# EAGLE board snake-power (EAGLE 6.5.0)
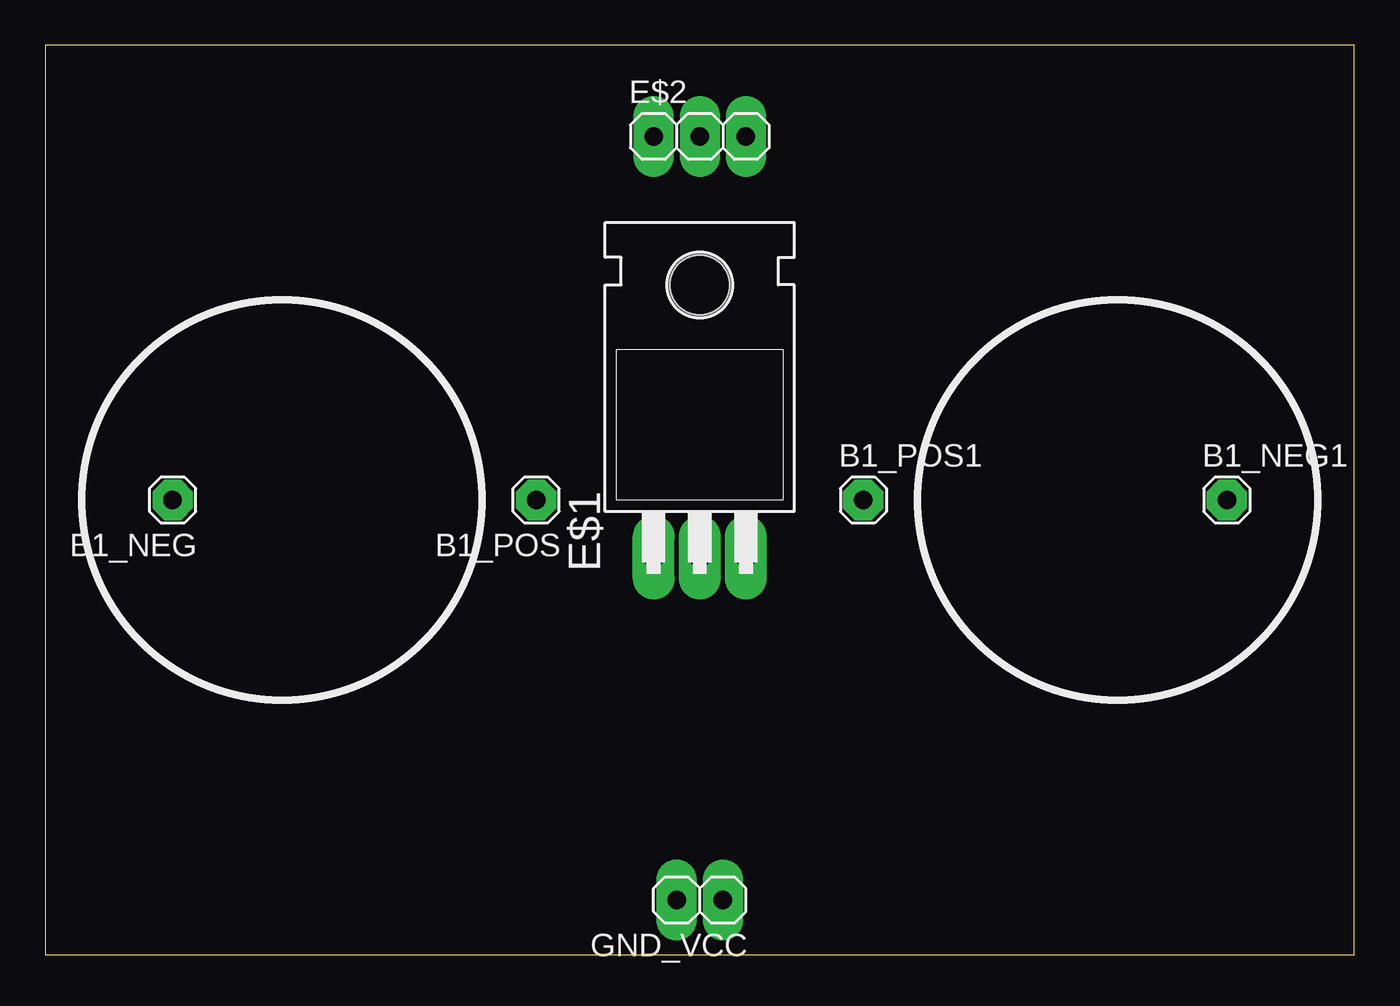
[diagram p0: board, top side]
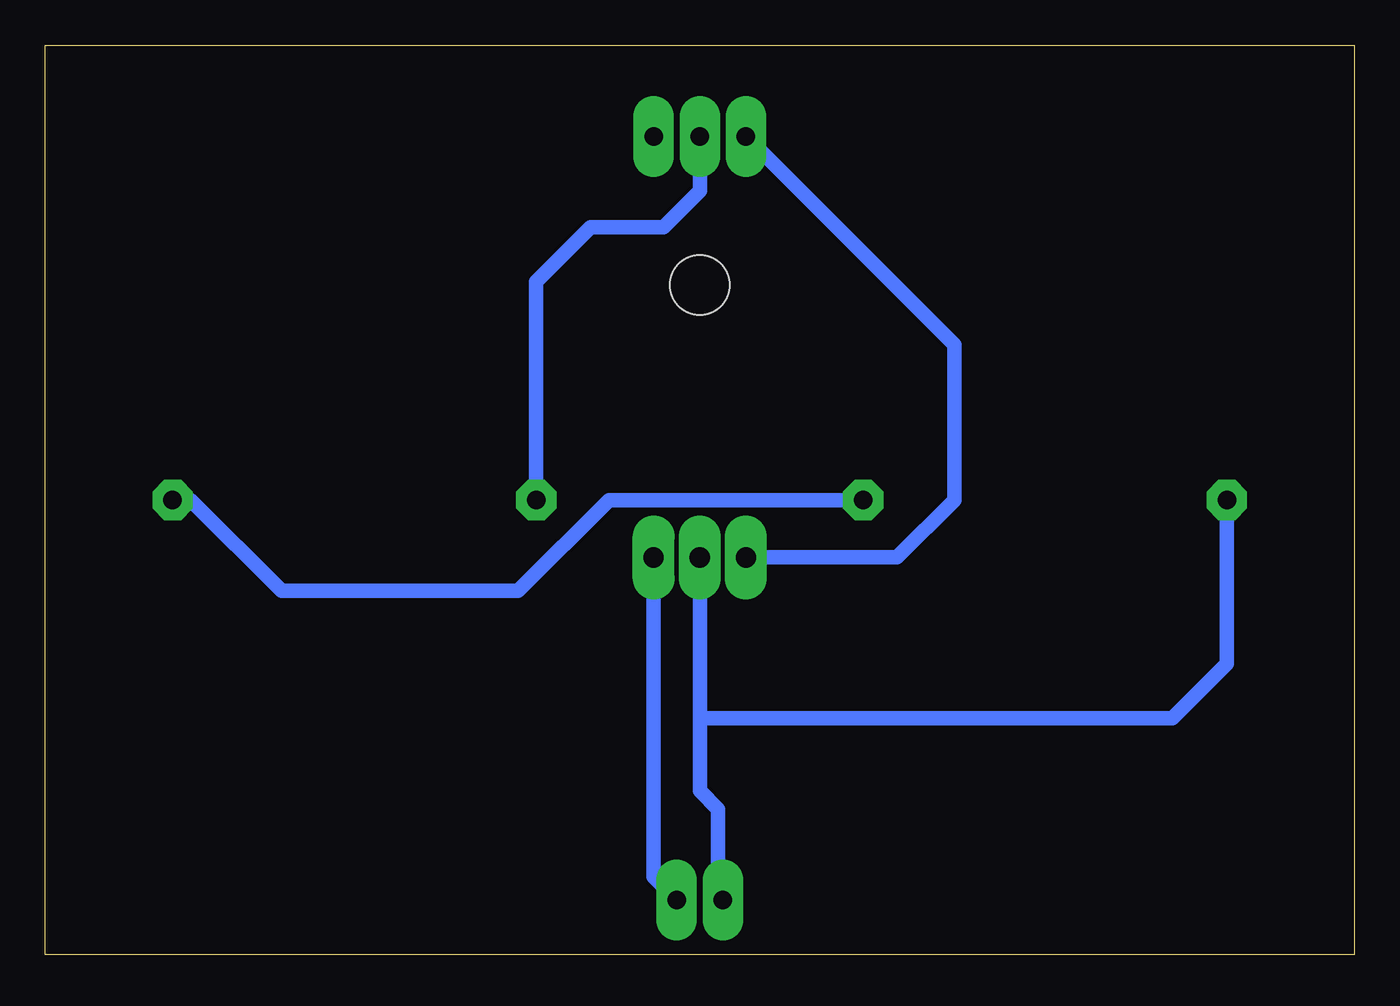
[diagram p1: board, bottom side, seen from below]

Size 72 x 50 mm. Coordinates in mm from the lower left corner, seen from the top.
Outline: 0,0 72,0 72,50 0,50 0,0
Copper layers (1*16): Top 0.035mm / dielectric 1.5mm / Bottom 0.035mm
Design rules "hobby": minimum track width 0.8mm, minimum drill 0.8mm, track to track 0.8mm, track to pad 0.8mm, pad to pad 0.45mm, via to via 0.8mm, smd to smd 8mil, copper to edge 10mil, drill to drill 8mil, minimum pad ring 0.6mm, minimum via ring 0.6mm, stop-mask expansion 0mil, vias tented up to drill 0mil, thermal gap 10mil

## Footprints (pad centres in the part's own frame; a part is rotated, then mirrored left to right if it is on the bottom)
1X01 = drill 1.016 octagon: 1 0,0
TO220H = drill 1.118 long: 1 -2.54,-10.16; 2 0,-10.16; 3 2.54,-10.16 | hole 3.302: 0,4.826
1X03 = drill 1.016 long: 1 -2.54,0; 2 0,0; 3 2.54,0
1X02 = drill 1.016 long: 1 -1.27,0; 2 1.27,0

## Placement (x,y rotation side)
B1_NEG  [1X01]  7,25 180 top
B1_NEG1  [1X01]  65,25 0 top
B1_POS  [1X01]  27,25 180 top
B1_POS1  [1X01]  45,25 0 top
E$1  [TO220H]  36,32 0 top
E$2  [1X03]  36,45 0 top
GND_VCC  [1X02]  36,3 180 top

## Library data of the parts
B1_NEG B1_NEG1 B1_POS B1_POS1 E$2 GND_VCC = pinhead
E$1 = adafruit

## Nets
S$1: B1_NEG.1 E$1.2 GND_VCC.2
S$2: E$1.3 GND_VCC.1
S$3: B1_NEG1.1 B1_POS.1
S$4: B1_POS1.1 E$2.2
S$5: E$1.1 E$2.1

## Tracks (layer width: path | path; a pad name or v marks a point on that pad's centre or on a via)
S$1
  Bottom 0.8: E$1.2 36,13 | 36,13 36,9 35,8 35,3.27 GND_VCC.2 | B1_NEG.1 7,16 10,13 36,13
S$2
  Bottom 0.8: E$1.3 38.54,4.27 GND_VCC.1
S$3
  Bottom 0.8: B1_POS.1 41,25 46,20 59,20 64,25 B1_NEG1.1
S$4
  Bottom 0.8: B1_POS1.1 45,37 42,40 38,40 36,42 E$2.2
S$5
  Bottom 0.8: E$2.1 22,33.54 22,25 25.16,21.84 E$1.1